# Altium PCB Board.PcbDoc
Units mm, origin at the board's own origin, x right, y up, seen from the top; angles counter-clockwise.
Board outline 370 x 200 mm, 2 copper layers (Top Layer, Bottom Layer); 8 components, 0 nets, 54 pads, 0 vias.
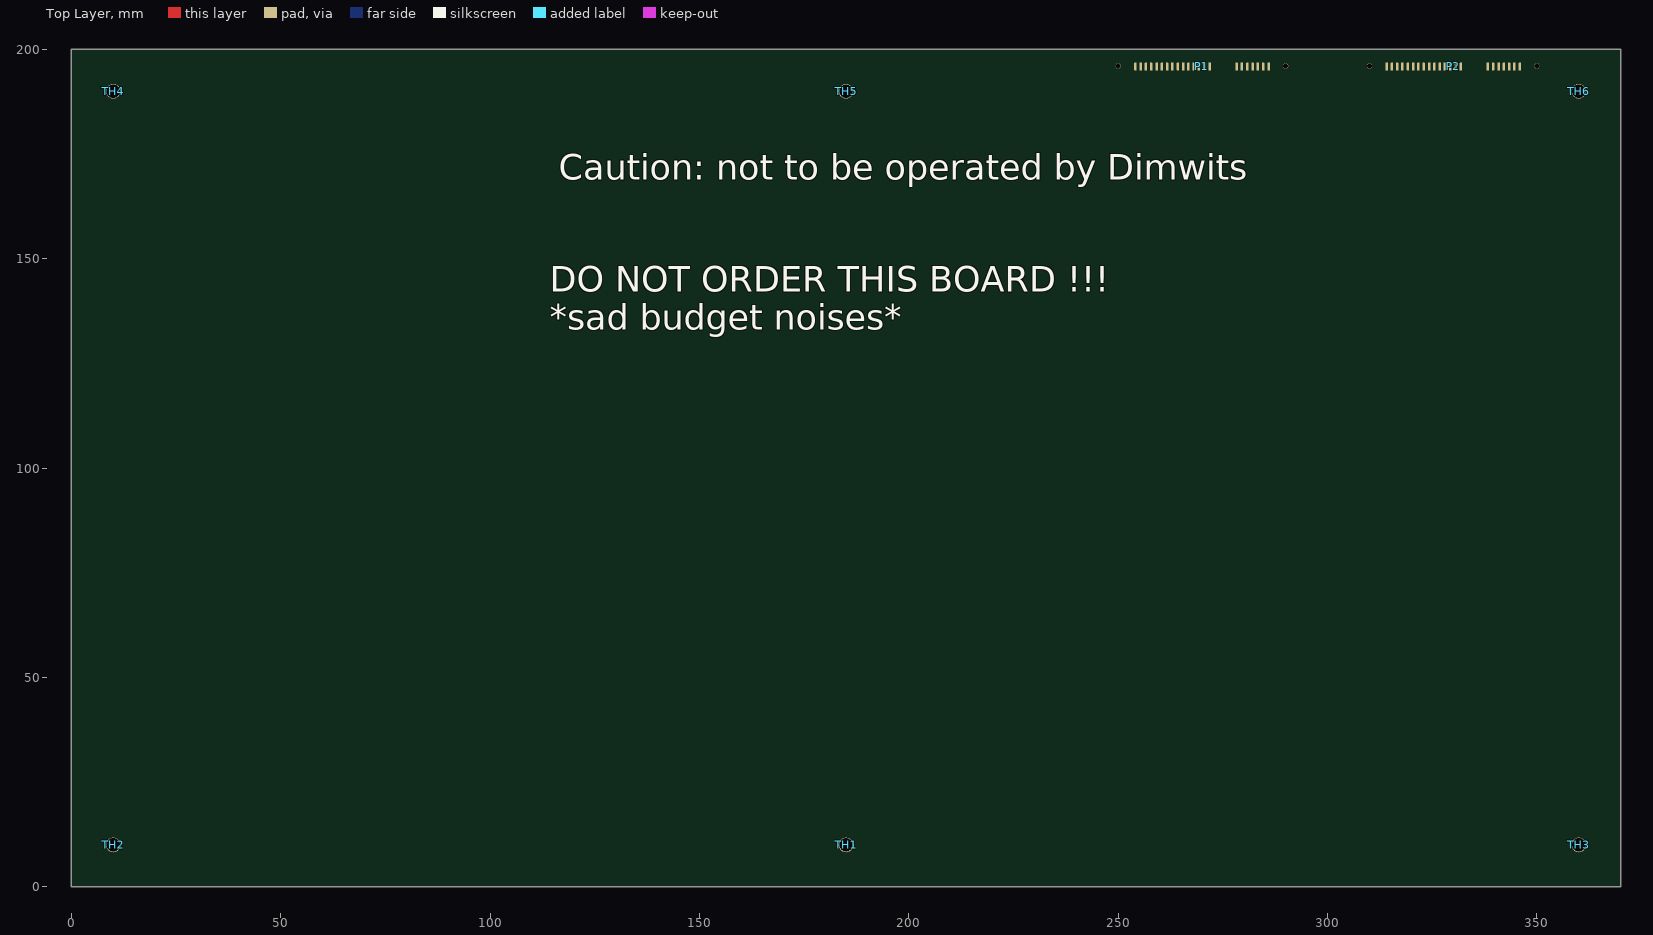
[diagram p0: Top Layer view]
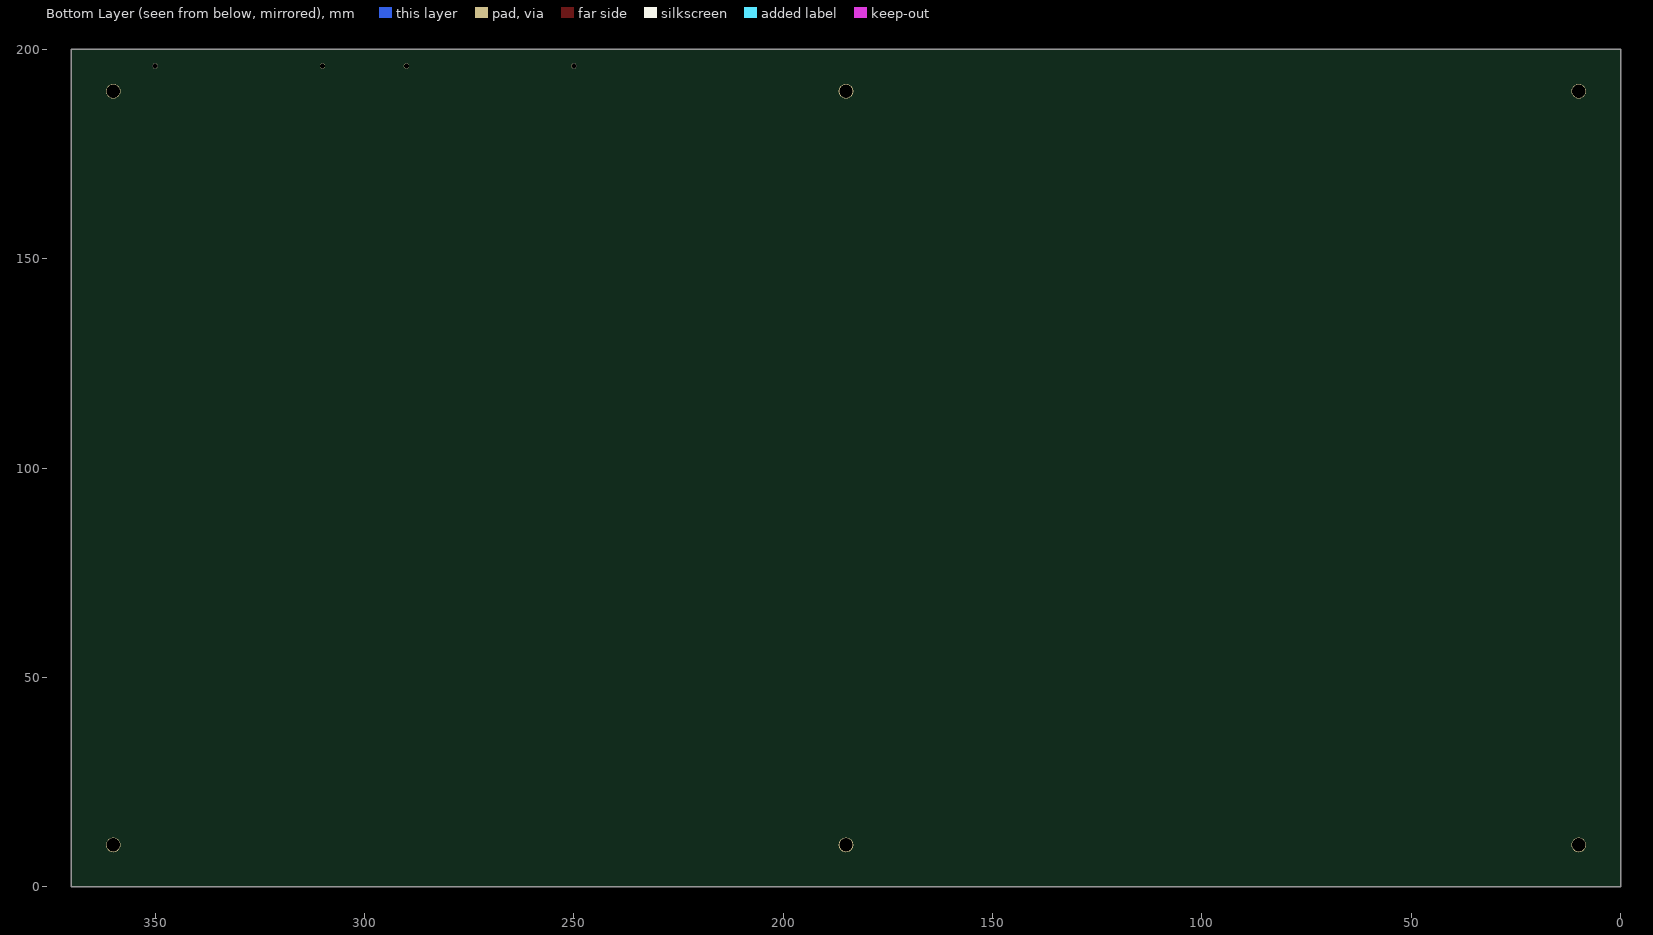
[diagram p1: Bottom Layer view, seen from below]

## Layer stack, top to bottom
Top Solder: solder mask 0.0102, Solder Resist, Dk 3.5
Top Layer: signal copper 0.0356
Dielectric 1: dielectric 0.32, FR-4, Dk 4.8
Bottom Layer: signal copper 0.0356
Bottom Solder: solder mask 0.0102, Solder Resist, Dk 3.5

## Board outline
0,0 370,0 370,200 0,200

## Design rules (kind name [scope] priority, off if disabled: settings)
Clearance [All] p1: gap=0.254 ignorepadtopadclearanceinfootprint=FALSE except(0: Arc-Hole Track-Hole SMDPad-Hole THPad-Hole Via-Hole Fill-Hole Poly-Hole Region-Hole Text-Hole)
PolygonConnect [All] p1: connectstyle=Relief reliefconductorwidth=0.254 reliefentries=4 polygonreliefangle="90 Angle" airgapwidth=0.254
RoutingVias [All] p1: holewidth=0.711 width=1.27 viastyle="Through Hole" minholewidth=0.711 minwidth=1.27 maxholewidth=0.711 maxwidth=1.27
SolderMaskExpansion [All] p1: expansion=0.102 istentingtop=FALSE
Width [All] p1: maxlimit=0.254 minlimit=0.254 preferedwidth=0.254
30 further rules are at their usual default settings.

## Components (designator, comment, footprint, x,y, rotation, side; value= is the part's Value field where it differs from the comment)
P1 "SATA 1" "Amphenol 10101788-002CLF" 270,197 r0 top
P2 "SATA 2" "Amphenol 10101788-002CLF" 330,197 r0 top
TH1 "M3_screw" m3screw#1 335.694,10 r270 top
TH2 "M3_screw" m3screw#2 345.694,10 r270 top
TH3 "M3_screw" m3screw#3 325.694,10 r270 top
TH4 "M3_screw" m3screw#2 345.694,190 r270 top
TH5 "M3_screw" m3screw#1 335.694,190 r270 top
TH6 "M3_screw" m3screw#3 325.694,190 r270 top

## Footprints (in the part's own frame and the unit in brackets; to place one, negate y for a bottom-side part, rotate by r counter-clockwise, add the part's x,y. Pads: shape width x height; smd on the part's side, far side on the other; paste and mask are expansions set on the pad)
"Amphenol 10101788-002CLF" [mm] "MALE R/A SATA SMT"
  rrect50% 0.6x1.9 smd: 1(-15.875,-1.1) 2(-14.63,-1.1) 3(-13.385,-1.1) 4(-12.14,-1.1) 5(-10.795,-1.1) 6(-9.55,-1.1) 7(-8.305,-1.1) 8(-7.06,-1.1) 9(-5.715,-1.1) 10(-4.47,-1.1) 11(-3.225,-1.1) 12(-1.98,-1.1) 13(-0.735,-1.1) 14(0.61,-1.1) 15(1.855,-1.1) 16(8.28,-1.1) 17(9.525,-1.1) 18(10.87,-1.1) 19(12.115,-1.1) 20(13.36,-1.1) 21(14.605,-1.1) 22(15.95,-1.1)
  round 1.25 hole 1.2: 3(-20,-0.98) 4(20,-0.98)
  body extent -22.75,-2 22.75,8.5, height 3.3
m3screw#1 [mm]
  round 3.5 hole 3.2: 0(0,-150.694)
m3screw#2 [mm]
  round 3.5 hole 3.2: 0(0,-335.694)
m3screw#3 [mm]
  round 3.5 hole 3.2: 0(0,34.306)

## Part data
P1: "SATA connector.  / Connector 1 for option 1 as per Spec", Supplier 1=Digi-Key
P2: "SATA connector.  / Connector 2 for option 1 as per Spec", Supplier 1=Digi-Key

## Nets (pads, with @x,y where several pads share a name; then routed paths per layer and width w, separated by ;. In a path a pad name is that pad's centre, name@x,y a point inside that pad or via, vN(x,y) a via of type N, cw(c..) or ccw(c..) an arc to the next point about the centre after c; other vN are vias at no path point)
pads on no net: P1.1 P1.2 P1.3 P1.4 P1.5 P1.6 P1.7 P1.8 P1.9 P1.10 P1.11 P1.12 P1.13 P1.14 P1.15 P1.16 P1.17 P1.18 P1.19 P1.20 P1.21 P1.22 P2.1 P2.2 P2.3 P2.4 P2.5 P2.6 P2.7 P2.8 P2.9 P2.10 P2.11 P2.12 P2.13 P2.14 P2.15 P2.16 P2.17 P2.18 P2.19 P2.20 P2.21 P2.22 TH1.0 TH2.0 TH3.0 TH4.0 TH5.0 TH6.0

## Silkscreen, mask and mechanical layers (free items; w line width, h text height)
Top Overlay:
  text "Caution: not to be operated by Dimwits" at 116.354,168.885 h6.1
  text "DO NOT ORDER THIS BOARD !!! / *sad budget noises*" at 114.2,133 h6.1

## Dimensions
352.75,205.025 to 376.675,199.725 on Top Overlay
370,201.75 to 376.675,200 on Top Overlay
352.755,200.254 to 370,200 on Top Overlay